# EAGLE board Servo_LED_X12 (EAGLE 9.5.2), part 1 of 3
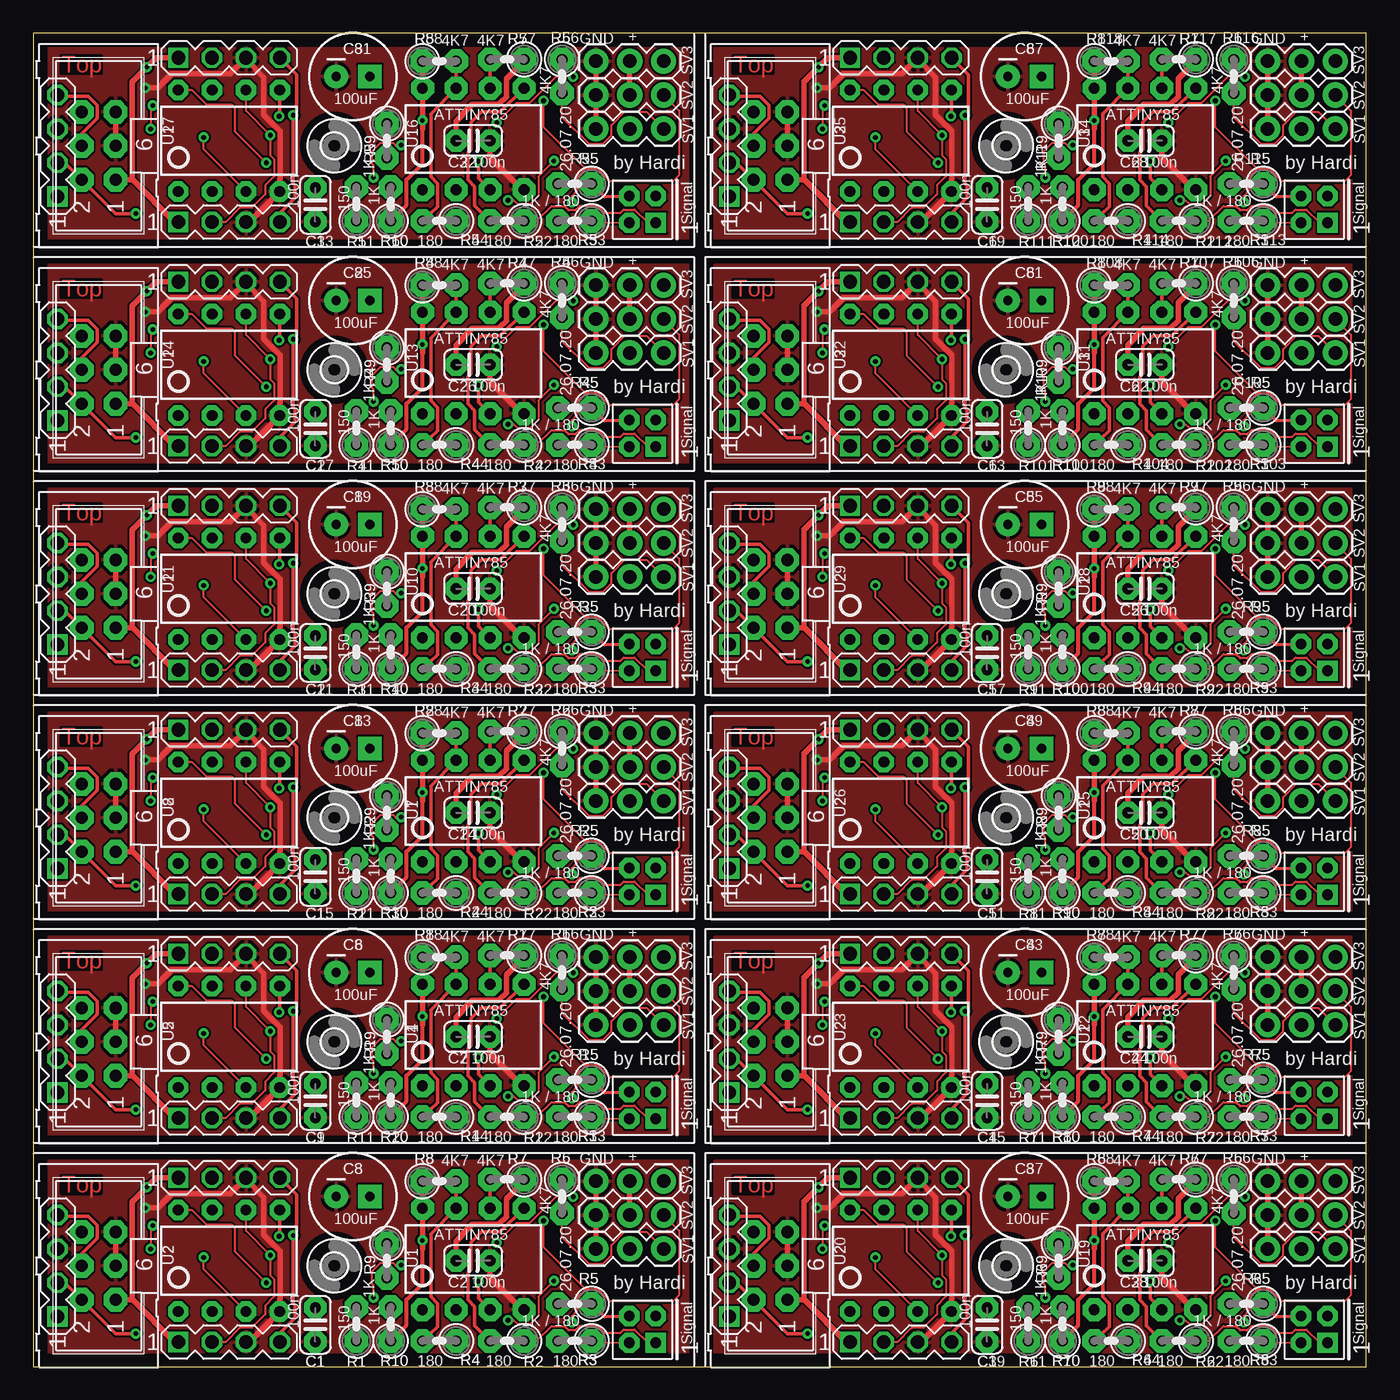
[diagram p0: board, top side]
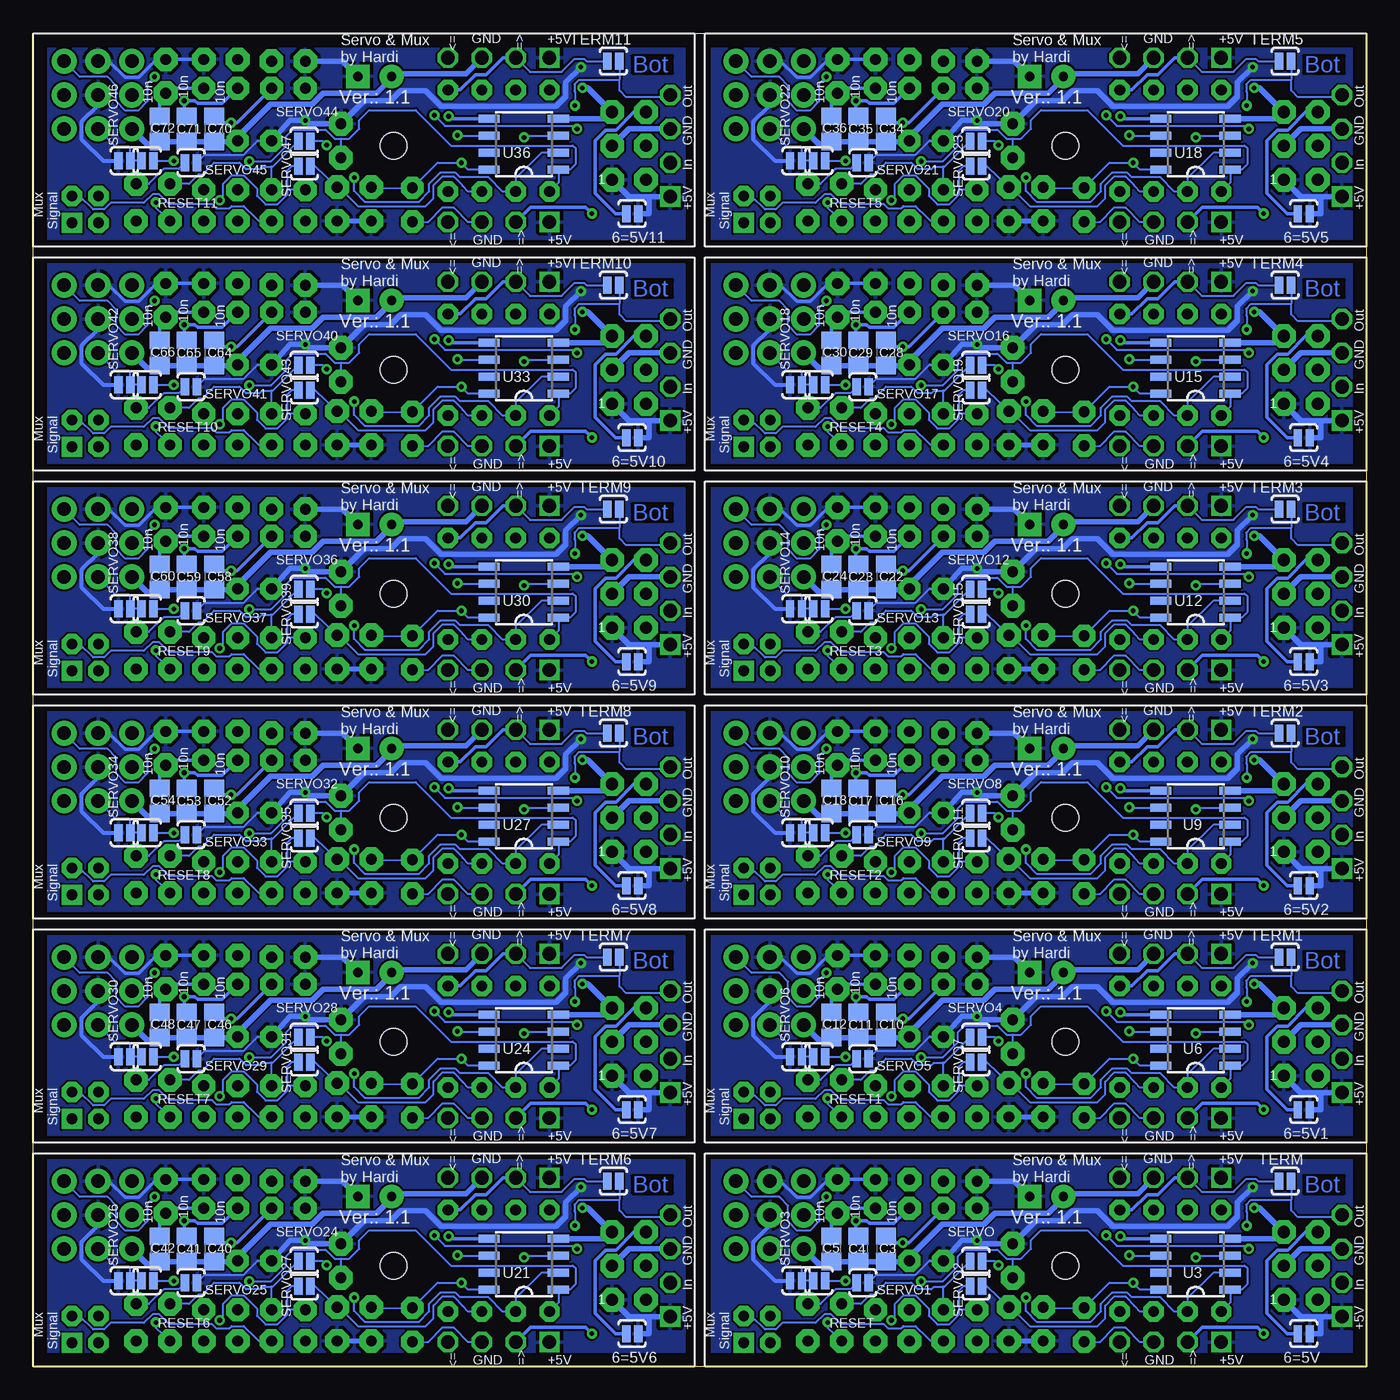
[diagram p1: board, bottom side, seen from below]

Size 100 x 99.99 mm. Coordinates in mm from the lower left corner, seen from the top.
Outline: 0,0 98.95,0
Outline: 0,15.99 0,0
Outline: 0,32.79 0,16.8
Outline: 0,49.59 0,33.6
Outline: 0,66.39 0,50.4
Outline: 0,83.19 0,67.2
Outline: 98.95,99.99 0,99.99 0,0
Outline: 50.4,0 98.95,0
Outline: 98.95,0 100,0
Outline: 100,0 100,15.99
Outline: 100,16.8 100,32.79
Outline: 100,33.6 100,49.59
Outline: 100,50.4 100,66.39
Outline: 100,67.2 100,83.19
Outline: 100,0 100,99.99 98.95,99.99
Outline: 98.95,99.99 50.4,99.99
Copper layers (1*16): Top 0.035mm / dielectric 1.5mm / Bottom 0.035mm
Design rules "default": minimum track width 6mil, minimum drill 0.35mm, track to track 6mil, track to pad 6mil, pad to pad 6mil, via to via 6mil, smd to smd 6mil, copper to edge 40mil, drill to drill 6mil, minimum pad ring 10mil, minimum via ring 8mil, stop-mask expansion 4mil, vias tented up to drill 0mil, thermal gap 10mil

## Footprints (pad centres in the part's own frame; a part is rotated, then mirrored left to right if it is on the bottom)
SJ_2S-NO = smd 0.635 x 1.27: 1 -0.45,0; 2 0.45,0
C025-024X044 = drill 0.813 pad 1.676 octagon: 1 -1.27,0; 2 1.27,0
C0805 = smd 1.3 x 1.5: 1 -0.95,0; 2 0.95,0
SPARKFUN-CAPACITORS_CPOL-RADIAL-100UF-25V = drill 0.7 pad 1.778 square: 1 1.27,0 | drill 0.7 pad 1.778: 2 -1.27,0
2,0 = hole 2: 0,0
1X03 = drill 1.016 pad 1.88: 1 0,0; 2 2.54,0; 3 5.08,0
ML6 = drill 0.914 pad 1.778 octagon: 1 -2.54,-1.27; 2 -2.54,1.27; 3 0,-1.27; 4 0,1.27; 5 2.54,-1.27; 6 2.54,1.27
RCL_0207/2V = drill 0.813 pad 1.778 octagon: 1 -1.27,0; 2 1.27,0
MUX-SIGNAL = drill 0.8 pad 1.524 square: 1 -1,-1 | drill 0.8 pad 1.524 octagon: 2 -1,1; 3 1,-1; 4 1,1
MA04-1 = drill 1.016 pad 1.524 square: 1 -3.81,0 | drill 1.016 pad 1.524 octagon: 2 -1.27,0; 3 1.27,0; 4 3.81,0
DIP08 = drill 0.813 pad 1.727 octagon: 1 -3.81,-3.81; 2 -1.27,-3.81; 3 1.27,-3.81; 4 3.81,-3.81; 5 3.81,3.81; 6 1.27,3.81; 7 -1.27,3.81; 8 -3.81,3.81
S3PO_MODUL_WS2811_SOUND_MP3-TF-16P_WS2811_AND_ATTINY_WS2811_DIP08 = drill 0.813 pad 1.524 octagon: 1 -3.81,-3.81; 2 -1.27,-3.81; 3 1.27,-3.81; 4 3.81,-3.81; 5 3.81,3.81; 6 1.27,3.81; 7 -1.27,3.81; 8 -3.81,3.81
SOP8 = smd 0.6 x 1.6: 1 -1.905,-2.6; 2 -0.635,-2.6; 3 0.635,-2.6; 4 1.905,-2.6; 5 1.905,2.6; 6 0.635,2.6; 7 -0.635,2.6; 8 -1.905,2.6

## Placement (x,y rotation side)
6=5V  SOLDERJUMPERNO  [SJ_2S-NO]  4.68,2.47 0 bottom
6=5V1  SOLDERJUMPERNO  [SJ_2S-NO]  4.68,19.28 0 bottom
6=5V2  SOLDERJUMPERNO  [SJ_2S-NO]  4.68,36.08 0 bottom
6=5V3  SOLDERJUMPERNO  [SJ_2S-NO]  4.68,52.88 0 bottom
6=5V4  SOLDERJUMPERNO  [SJ_2S-NO]  4.68,69.68 0 bottom
6=5V5  SOLDERJUMPERNO  [SJ_2S-NO]  4.68,86.48 0 bottom
6=5V6  SOLDERJUMPERNO  [SJ_2S-NO]  55.08,2.47 0 bottom
6=5V7  SOLDERJUMPERNO  [SJ_2S-NO]  55.08,19.28 0 bottom
6=5V8  SOLDERJUMPERNO  [SJ_2S-NO]  55.08,36.08 0 bottom
6=5V9  SOLDERJUMPERNO  [SJ_2S-NO]  55.08,52.88 0 bottom
6=5V10  SOLDERJUMPERNO  [SJ_2S-NO]  55.08,69.68 0 bottom
6=5V11  SOLDERJUMPERNO  [SJ_2S-NO]  55.08,86.48 0 bottom
C1  100n  [C025-024X044]  21.16,3.14 270 top
C2  100n  [C025-024X044]  33,7.94 0 top
C3  10n  [C0805]  36.05,8.82 270 bottom
C4  10n  [C0805]  38.08,8.82 270 bottom
C5  10n  [C0805]  40.11,8.82 270 bottom
C6  100uF  [SPARKFUN-CAPACITORS_CPOL-RADIAL-100UF-25V]  23.98,29.56 0 top
C7  100n  [C025-024X044]  33,24.74 0 top
C8  100uF  [SPARKFUN-CAPACITORS_CPOL-RADIAL-100UF-25V]  23.98,12.76 0 top
C9  100n  [C025-024X044]  21.16,19.94 270 top
C10  10n  [C0805]  36.05,25.63 270 bottom
C11  10n  [C0805]  38.08,25.63 270 bottom
C12  10n  [C0805]  40.11,25.63 270 bottom
C13  100uF  [SPARKFUN-CAPACITORS_CPOL-RADIAL-100UF-25V]  23.98,46.36 0 top
C14  100n  [C025-024X044]  33,41.54 0 top
C15  100n  [C025-024X044]  21.16,36.74 270 top
C16  10n  [C0805]  36.05,42.43 270 bottom
C17  10n  [C0805]  38.08,42.43 270 bottom
C18  10n  [C0805]  40.11,42.43 270 bottom
C19  100uF  [SPARKFUN-CAPACITORS_CPOL-RADIAL-100UF-25V]  23.98,63.16 0 top
C20  100n  [C025-024X044]  33,58.34 0 top
C21  100n  [C025-024X044]  21.16,53.54 270 top
C22  10n  [C0805]  36.05,59.23 270 bottom
C23  10n  [C0805]  38.08,59.23 270 bottom
C24  10n  [C0805]  40.11,59.23 270 bottom
C25  100uF  [SPARKFUN-CAPACITORS_CPOL-RADIAL-100UF-25V]  23.98,79.96 0 top
C26  100n  [C025-024X044]  33,75.14 0 top
C27  100n  [C025-024X044]  21.16,70.34 270 top
C28  10n  [C0805]  36.05,76.03 270 bottom
C29  10n  [C0805]  38.08,76.03 270 bottom
C30  10n  [C0805]  40.11,76.03 270 bottom
C31  100uF  [SPARKFUN-CAPACITORS_CPOL-RADIAL-100UF-25V]  23.98,96.76 0 top
C32  100n  [C025-024X044]  33,91.94 0 top
C33  100n  [C025-024X044]  21.16,87.14 270 top
C34  10n  [C0805]  36.05,92.83 270 bottom
C35  10n  [C0805]  38.08,92.83 270 bottom
C36  10n  [C0805]  40.11,92.83 270 bottom
C37  100uF  [SPARKFUN-CAPACITORS_CPOL-RADIAL-100UF-25V]  74.38,12.76 0 top
C38  100n  [C025-024X044]  83.4,7.94 0 top
C39  100n  [C025-024X044]  71.56,3.14 270 top
C40  10n  [C0805]  86.45,8.82 270 bottom
C41  10n  [C0805]  88.48,8.82 270 bottom
C42  10n  [C0805]  90.51,8.82 270 bottom
C43  100uF  [SPARKFUN-CAPACITORS_CPOL-RADIAL-100UF-25V]  74.38,29.56 0 top
C44  100n  [C025-024X044]  83.4,24.74 0 top
C45  100n  [C025-024X044]  71.56,19.94 270 top
C46  10n  [C0805]  86.45,25.63 270 bottom
C47  10n  [C0805]  88.48,25.63 270 bottom
C48  10n  [C0805]  90.51,25.63 270 bottom
C49  100uF  [SPARKFUN-CAPACITORS_CPOL-RADIAL-100UF-25V]  74.38,46.36 0 top
C50  100n  [C025-024X044]  83.4,41.54 0 top
C51  100n  [C025-024X044]  71.56,36.74 270 top
C52  10n  [C0805]  86.45,42.43 270 bottom
C53  10n  [C0805]  88.48,42.43 270 bottom
C54  10n  [C0805]  90.51,42.43 270 bottom
C55  100uF  [SPARKFUN-CAPACITORS_CPOL-RADIAL-100UF-25V]  74.38,63.16 0 top
C56  100n  [C025-024X044]  83.4,58.34 0 top
C57  100n  [C025-024X044]  71.56,53.54 270 top
C58  10n  [C0805]  86.45,59.23 270 bottom
C59  10n  [C0805]  88.48,59.23 270 bottom
C60  10n  [C0805]  90.51,59.23 270 bottom
C61  100uF  [SPARKFUN-CAPACITORS_CPOL-RADIAL-100UF-25V]  74.38,79.96 0 top
C62  100n  [C025-024X044]  83.4,75.14 0 top
C63  100n  [C025-024X044]  71.56,70.34 270 top
C64  10n  [C0805]  86.45,76.03 270 bottom
C65  10n  [C0805]  88.48,76.03 270 bottom
C66  10n  [C0805]  90.51,76.03 270 bottom
C67  100uF  [SPARKFUN-CAPACITORS_CPOL-RADIAL-100UF-25V]  74.38,96.76 0 top
C68  100n  [C025-024X044]  83.4,91.94 0 top
C69  100n  [C025-024X044]  71.56,87.14 270 top
C70  10n  [C0805]  86.45,92.83 270 bottom
C71  10n  [C0805]  88.48,92.83 270 bottom
C72  10n  [C0805]  90.51,92.83 270 bottom
H1  MOUNT-HOLE2.0  [2,0]  22.59,7.55 0 top
H2  MOUNT-HOLE2.0  [2,0]  22.59,24.36 0 top
H3  MOUNT-HOLE2.0  [2,0]  22.59,41.16 0 top
H4  MOUNT-HOLE2.0  [2,0]  22.59,57.96 0 top
H5  MOUNT-HOLE2.0  [2,0]  22.59,74.76 0 top
H6  MOUNT-HOLE2.0  [2,0]  22.59,91.56 0 top
H7  MOUNT-HOLE2.0  [2,0]  72.99,7.55 0 top
H8  MOUNT-HOLE2.0  [2,0]  72.99,24.36 0 top
H9  MOUNT-HOLE2.0  [2,0]  72.99,41.16 0 top
H10  MOUNT-HOLE2.0  [2,0]  72.99,57.96 0 top
H11  MOUNT-HOLE2.0  [2,0]  72.99,74.76 0 top
H12  MOUNT-HOLE2.0  [2,0]  72.99,91.56 0 top
J1  SV1  [1X03]  47.29,8.82 180 top
J2  SV2  [1X03]  47.29,11.36 180 top
J3  SV3  [1X03]  47.29,13.9 180 top
J4  SV1  [1X03]  47.29,25.63 180 top
J5  SV2  [1X03]  47.29,28.17 180 top
J6  SV3  [1X03]  47.29,30.71 180 top
J7  SV1  [1X03]  47.29,42.43 180 top
J8  SV2  [1X03]  47.29,44.97 180 top
J9  SV3  [1X03]  47.29,47.51 180 top
J10  SV1  [1X03]  47.29,59.23 180 top
J11  SV2  [1X03]  47.29,61.77 180 top
J12  SV3  [1X03]  47.29,64.31 180 top
J13  SV1  [1X03]  47.29,76.03 180 top
J14  SV2  [1X03]  47.29,78.57 180 top
J15  SV3  [1X03]  47.29,81.11 180 top
J16  SV1  [1X03]  47.29,92.83 180 top
J17  SV2  [1X03]  47.29,95.37 180 top
J18  SV3  [1X03]  47.29,97.91 180 top
J19  SV1  [1X03]  97.69,8.82 180 top
J20  SV2  [1X03]  97.69,11.36 180 top
J21  SV3  [1X03]  97.69,13.9 180 top
J22  SV1  [1X03]  97.69,25.63 180 top
J23  SV2  [1X03]  97.69,28.17 180 top
J24  SV3  [1X03]  97.69,30.71 180 top
J25  SV1  [1X03]  97.69,42.43 180 top
J26  SV2  [1X03]  97.69,44.97 180 top
J27  SV3  [1X03]  97.69,47.51 180 top
J28  SV1  [1X03]  97.69,59.23 180 top
J29  SV2  [1X03]  97.69,61.77 180 top
J30  SV3  [1X03]  97.69,64.31 180 top
J31  SV1  [1X03]  97.69,76.03 180 top
J32  SV2  [1X03]  97.69,78.57 180 top
J33  SV3  [1X03]  97.69,81.11 180 top
J34  SV1  [1X03]  97.69,92.83 180 top
J35  SV2  [1X03]  97.69,95.37 180 top
J36  SV3  [1X03]  97.69,97.91 180 top
O1  [ML6]  4.9,7.55 90 top
O2  [ML6]  4.9,24.36 90 top
O3  [ML6]  4.9,41.16 90 top
O4  [ML6]  4.9,57.96 90 top
O5  [ML6]  4.9,74.76 90 top
O6  [ML6]  4.9,91.56 90 top
O7  [ML6]  55.3,7.55 90 top
O8  [ML6]  55.3,24.36 90 top
O9  [ML6]  55.3,41.16 90 top
O10  [ML6]  55.3,57.96 90 top
O11  [ML6]  55.3,74.76 90 top
O12  [ML6]  55.3,91.56 90 top
R1  150  [RCL_0207/2V]  24.24,3.19 90 top
R2  180  [RCL_0207/2V]  35.54,1.92 180 top
R3  180  [RCL_0207/2V]  40.62,1.92 180 top
R4  180  [RCL_0207/2V]  30.46,1.92 180 top
R5  1K / 180  [RCL_0207/2V]  40.62,4.7 180 top
R6  4K7  [RCL_0207/2V]  39.67,12.76 270 top
R7  4K7  [RCL_0207/2V]  35.54,14.03 180 top
R8  4K7  [RCL_0207/2V]  30.46,13.9 0 top
R9  1K  [RCL_0207/2V]  26.52,7.94 270 top
R10  1K  [RCL_0207/2V]  26.81,3.19 90 top
R11  150  [RCL_0207/2V]  24.24,19.99 90 top
R12  180  [RCL_0207/2V]  35.54,18.72 180 top
R13  180  [RCL_0207/2V]  40.62,18.72 180 top
R14  180  [RCL_0207/2V]  30.46,18.72 180 top
R15  1K / 180  [RCL_0207/2V]  40.62,21.5 180 top
R16  4K7  [RCL_0207/2V]  39.67,29.56 270 top
R17  4K7  [RCL_0207/2V]  35.54,30.83 180 top
R18  4K7  [RCL_0207/2V]  30.46,30.71 0 top
R19  1K  [RCL_0207/2V]  26.52,24.74 270 top
R20  1K  [RCL_0207/2V]  26.81,19.99 90 top
R21  150  [RCL_0207/2V]  24.24,36.79 90 top
R22  180  [RCL_0207/2V]  35.54,35.52 180 top
R23  180  [RCL_0207/2V]  40.62,35.52 180 top
R24  180  [RCL_0207/2V]  30.46,35.52 180 top
R25  1K / 180  [RCL_0207/2V]  40.62,38.3 180 top
R26  4K7  [RCL_0207/2V]  39.67,46.36 270 top
R27  4K7  [RCL_0207/2V]  35.54,47.63 180 top
R28  4K7  [RCL_0207/2V]  30.46,47.51 0 top
R29  1K  [RCL_0207/2V]  26.52,41.54 270 top
R30  1K  [RCL_0207/2V]  26.81,36.79 90 top
R31  150  [RCL_0207/2V]  24.24,53.59 90 top
R32  180  [RCL_0207/2V]  35.54,52.32 180 top
R33  180  [RCL_0207/2V]  40.62,52.32 180 top
R34  180  [RCL_0207/2V]  30.46,52.32 180 top
R35  1K / 180  [RCL_0207/2V]  40.62,55.1 180 top
R36  4K7  [RCL_0207/2V]  39.67,63.16 270 top
R37  4K7  [RCL_0207/2V]  35.54,64.43 180 top
R38  4K7  [RCL_0207/2V]  30.46,64.31 0 top
R39  1K  [RCL_0207/2V]  26.52,58.34 270 top
R40  1K  [RCL_0207/2V]  26.81,53.59 90 top
R41  150  [RCL_0207/2V]  24.24,70.39 90 top
R42  180  [RCL_0207/2V]  35.54,69.12 180 top
R43  180  [RCL_0207/2V]  40.62,69.12 180 top
R44  180  [RCL_0207/2V]  30.46,69.12 180 top
R45  1K / 180  [RCL_0207/2V]  40.62,71.9 180 top
R46  4K7  [RCL_0207/2V]  39.67,79.96 270 top
R47  4K7  [RCL_0207/2V]  35.54,81.23 180 top
R48  4K7  [RCL_0207/2V]  30.46,81.11 0 top
R49  1K  [RCL_0207/2V]  26.52,75.14 270 top
R50  1K  [RCL_0207/2V]  26.81,70.39 90 top
R51  150  [RCL_0207/2V]  24.24,87.19 90 top
R52  180  [RCL_0207/2V]  35.54,85.92 180 top
R53  180  [RCL_0207/2V]  40.62,85.92 180 top
R54  180  [RCL_0207/2V]  30.46,85.92 180 top
R55  1K / 180  [RCL_0207/2V]  40.62,88.7 180 top
R56  4K7  [RCL_0207/2V]  39.67,96.76 270 top
R57  4K7  [RCL_0207/2V]  35.54,98.03 180 top
R58  4K7  [RCL_0207/2V]  30.46,97.91 0 top
R59  1K  [RCL_0207/2V]  26.52,91.94 270 top
R60  1K  [RCL_0207/2V]  26.81,87.19 90 top
R61  150  [RCL_0207/2V]  74.64,3.19 90 top
R62  180  [RCL_0207/2V]  85.94,1.92 180 top
R63  180  [RCL_0207/2V]  91.02,1.92 180 top
R64  180  [RCL_0207/2V]  80.86,1.92 180 top
R65  1K / 180  [RCL_0207/2V]  91.02,4.7 180 top
R66  4K7  [RCL_0207/2V]  90.07,12.76 270 top
R67  4K7  [RCL_0207/2V]  85.94,14.03 180 top
R68  4K7  [RCL_0207/2V]  80.86,13.9 0 top
R69  1K  [RCL_0207/2V]  76.92,7.94 270 top
R70  1K  [RCL_0207/2V]  77.21,3.19 90 top
R71  150  [RCL_0207/2V]  74.64,19.99 90 top
R72  180  [RCL_0207/2V]  85.94,18.72 180 top
R73  180  [RCL_0207/2V]  91.02,18.72 180 top
R74  180  [RCL_0207/2V]  80.86,18.72 180 top
R75  1K / 180  [RCL_0207/2V]  91.02,21.5 180 top
R76  4K7  [RCL_0207/2V]  90.07,29.56 270 top
R77  4K7  [RCL_0207/2V]  85.94,30.83 180 top
R78  4K7  [RCL_0207/2V]  80.86,30.71 0 top
R79  1K  [RCL_0207/2V]  76.92,24.74 270 top
R80  1K  [RCL_0207/2V]  77.21,19.99 90 top
R81  150  [RCL_0207/2V]  74.64,36.79 90 top
R82  180  [RCL_0207/2V]  85.94,35.52 180 top
R83  180  [RCL_0207/2V]  91.02,35.52 180 top
R84  180  [RCL_0207/2V]  80.86,35.52 180 top
R85  1K / 180  [RCL_0207/2V]  91.02,38.3 180 top
R86  4K7  [RCL_0207/2V]  90.07,46.36 270 top
R87  4K7  [RCL_0207/2V]  85.94,47.63 180 top
R88  4K7  [RCL_0207/2V]  80.86,47.51 0 top
R89  1K  [RCL_0207/2V]  76.92,41.54 270 top
R90  1K  [RCL_0207/2V]  77.21,36.79 90 top
R91  150  [RCL_0207/2V]  74.64,53.59 90 top
R92  180  [RCL_0207/2V]  85.94,52.32 180 top
R93  180  [RCL_0207/2V]  91.02,52.32 180 top
R94  180  [RCL_0207/2V]  80.86,52.32 180 top
R95  1K / 180  [RCL_0207/2V]  91.02,55.1 180 top
R96  4K7  [RCL_0207/2V]  90.07,63.16 270 top
R97  4K7  [RCL_0207/2V]  85.94,64.43 180 top
R98  4K7  [RCL_0207/2V]  80.86,64.31 0 top
R99  1K  [RCL_0207/2V]  76.92,58.34 270 top
R100  1K  [RCL_0207/2V]  77.21,53.59 90 top
R101  150  [RCL_0207/2V]  74.64,70.39 90 top
R102  180  [RCL_0207/2V]  85.94,69.12 180 top
R103  180  [RCL_0207/2V]  91.02,69.12 180 top
R104  180  [RCL_0207/2V]  80.86,69.12 180 top
R105  1K / 180  [RCL_0207/2V]  91.02,71.9 180 top
R106  4K7  [RCL_0207/2V]  90.07,79.96 270 top
R107  4K7  [RCL_0207/2V]  85.94,81.23 180 top
R108  4K7  [RCL_0207/2V]  80.86,81.11 0 top
R109  1K  [RCL_0207/2V]  76.92,75.14 270 top
R110  1K  [RCL_0207/2V]  77.21,70.39 90 top
R111  150  [RCL_0207/2V]  74.64,87.19 90 top
R112  180  [RCL_0207/2V]  85.94,85.92 180 top
R113  180  [RCL_0207/2V]  91.02,85.92 180 top
R114  180  [RCL_0207/2V]  80.86,85.92 180 top
R115  1K / 180  [RCL_0207/2V]  91.02,88.7 180 top
R116  4K7  [RCL_0207/2V]  90.07,96.76 270 top
R117  4K7  [RCL_0207/2V]  85.94,98.03 180 top
R118  4K7  [RCL_0207/2V]  80.86,97.91 0 top
R119  1K  [RCL_0207/2V]  76.92,91.94 270 top
R120  1K  [RCL_0207/2V]  77.21,87.19 90 top
RESET  SOLDERJUMPERNO  [SJ_2S-NO]  41.05,6.44 180 bottom
RESET1  SOLDERJUMPERNO  [SJ_2S-NO]  41.05,23.24 180 bottom
RESET2  SOLDERJUMPERNO  [SJ_2S-NO]  41.05,40.04 180 bottom
RESET3  SOLDERJUMPERNO  [SJ_2S-NO]  41.05,56.84 180 bottom
RESET4  SOLDERJUMPERNO  [SJ_2S-NO]  41.05,73.64 180 bottom
RESET5  SOLDERJUMPERNO  [SJ_2S-NO]  41.05,90.44 180 bottom
RESET6  SOLDERJUMPERNO  [SJ_2S-NO]  91.45,6.44 180 bottom
RESET7  SOLDERJUMPERNO  [SJ_2S-NO]  91.45,23.24 180 bottom
RESET8  SOLDERJUMPERNO  [SJ_2S-NO]  91.45,40.04 180 bottom
RESET9  SOLDERJUMPERNO  [SJ_2S-NO]  91.45,56.84 180 bottom
RESET10  SOLDERJUMPERNO  [SJ_2S-NO]  91.45,73.64 180 bottom
RESET11  SOLDERJUMPERNO  [SJ_2S-NO]  91.45,90.44 180 bottom
SERVO  SOLDERJUMPERNO  [SJ_2S-NO]  29.28,7.9 180 bottom
SERVO1  SOLDERJUMPERNO  [SJ_2S-NO]  37.76,6.29 0 bottom
SERVO2  SOLDERJUMPERNO  [SJ_2S-NO]  29.27,6.03 180 bottom
SERVO3  SOLDERJUMPERNO  [SJ_2S-NO]  42.78,6.44 180 bottom
SERVO4  SOLDERJUMPERNO  [SJ_2S-NO]  29.28,24.7 180 bottom
SERVO5  SOLDERJUMPERNO  [SJ_2S-NO]  37.76,23.09 0 bottom
SERVO6  SOLDERJUMPERNO  [SJ_2S-NO]  42.78,23.24 180 bottom
SERVO7  SOLDERJUMPERNO  [SJ_2S-NO]  29.27,22.83 180 bottom
SERVO8  SOLDERJUMPERNO  [SJ_2S-NO]  29.28,41.5 180 bottom
SERVO9  SOLDERJUMPERNO  [SJ_2S-NO]  37.76,39.89 0 bottom
SERVO10  SOLDERJUMPERNO  [SJ_2S-NO]  42.78,40.04 180 bottom
SERVO11  SOLDERJUMPERNO  [SJ_2S-NO]  29.27,39.63 180 bottom
SERVO12  SOLDERJUMPERNO  [SJ_2S-NO]  29.28,58.3 180 bottom
SERVO13  SOLDERJUMPERNO  [SJ_2S-NO]  37.76,56.69 0 bottom
SERVO14  SOLDERJUMPERNO  [SJ_2S-NO]  42.78,56.84 180 bottom
SERVO15  SOLDERJUMPERNO  [SJ_2S-NO]  29.27,56.43 180 bottom
SERVO16  SOLDERJUMPERNO  [SJ_2S-NO]  29.28,75.1 180 bottom
SERVO17  SOLDERJUMPERNO  [SJ_2S-NO]  37.76,73.49 0 bottom
SERVO18  SOLDERJUMPERNO  [SJ_2S-NO]  42.78,73.64 180 bottom
SERVO19  SOLDERJUMPERNO  [SJ_2S-NO]  29.27,73.23 180 bottom
SERVO20  SOLDERJUMPERNO  [SJ_2S-NO]  29.28,91.9 180 bottom
SERVO21  SOLDERJUMPERNO  [SJ_2S-NO]  37.76,90.29 0 bottom
SERVO22  SOLDERJUMPERNO  [SJ_2S-NO]  42.78,90.44 180 bottom
SERVO23  SOLDERJUMPERNO  [SJ_2S-NO]  29.27,90.03 180 bottom
SERVO24  SOLDERJUMPERNO  [SJ_2S-NO]  79.68,7.9 180 bottom
SERVO25  SOLDERJUMPERNO  [SJ_2S-NO]  88.16,6.29 0 bottom
SERVO26  SOLDERJUMPERNO  [SJ_2S-NO]  93.18,6.44 180 bottom
SERVO27  SOLDERJUMPERNO  [SJ_2S-NO]  79.67,6.03 180 bottom
SERVO28  SOLDERJUMPERNO  [SJ_2S-NO]  79.68,24.7 180 bottom
SERVO29  SOLDERJUMPERNO  [SJ_2S-NO]  88.16,23.09 0 bottom
SERVO30  SOLDERJUMPERNO  [SJ_2S-NO]  93.18,23.24 180 bottom
SERVO31  SOLDERJUMPERNO  [SJ_2S-NO]  79.67,22.83 180 bottom
SERVO32  SOLDERJUMPERNO  [SJ_2S-NO]  79.68,41.5 180 bottom
SERVO33  SOLDERJUMPERNO  [SJ_2S-NO]  88.16,39.89 0 bottom
SERVO34  SOLDERJUMPERNO  [SJ_2S-NO]  93.18,40.04 180 bottom
SERVO35  SOLDERJUMPERNO  [SJ_2S-NO]  79.67,39.63 180 bottom
SERVO36  SOLDERJUMPERNO  [SJ_2S-NO]  79.68,58.3 180 bottom
SERVO37  SOLDERJUMPERNO  [SJ_2S-NO]  88.16,56.69 0 bottom
SERVO38  SOLDERJUMPERNO  [SJ_2S-NO]  93.18,56.84 180 bottom
SERVO39  SOLDERJUMPERNO  [SJ_2S-NO]  79.67,56.43 180 bottom
SERVO40  SOLDERJUMPERNO  [SJ_2S-NO]  79.68,75.1 180 bottom
SERVO41  SOLDERJUMPERNO  [SJ_2S-NO]  88.16,73.49 0 bottom
SERVO42  SOLDERJUMPERNO  [SJ_2S-NO]  93.18,73.64 180 bottom
SERVO43  SOLDERJUMPERNO  [SJ_2S-NO]  79.67,73.23 180 bottom
SERVO44  SOLDERJUMPERNO  [SJ_2S-NO]  79.68,91.9 180 bottom
SERVO45  SOLDERJUMPERNO  [SJ_2S-NO]  88.16,90.29 0 bottom
SERVO46  SOLDERJUMPERNO  [SJ_2S-NO]  93.18,90.44 180 bottom
SERVO47  SOLDERJUMPERNO  [SJ_2S-NO]  79.67,90.03 180 bottom
SV1  [MUX-SIGNAL]  45.71,2.78 90 top
SV2  [MA04-1]  14.68,30.96 0 top
SV3  [MA04-1]  14.68,14.16 0 top
SV4  [MA04-1]  14.68,1.84 0 top
SV5  [MA04-1]  1.82,7.55 90 top
SV6  [MA04-1]  14.68,18.64 0 top
SV7  [MA04-1]  1.82,24.36 90 top
SV8  [MUX-SIGNAL]  45.71,19.58 90 top
SV9  [MA04-1]  14.68,47.76 0 top
SV10  [MA04-1]  14.68,35.44 0 top
SV11  [MA04-1]  1.82,41.16 90 top
SV12  [MUX-SIGNAL]  45.71,36.38 90 top
SV13  [MA04-1]  14.68,64.56 0 top
SV14  [MA04-1]  14.68,52.24 0 top
SV15  [MA04-1]  1.82,57.96 90 top
SV16  [MUX-SIGNAL]  45.71,53.18 90 top
SV17  [MA04-1]  14.68,81.36 0 top
SV18  [MA04-1]  14.68,69.04 0 top
SV19  [MA04-1]  1.82,74.76 90 top
SV20  [MUX-SIGNAL]  45.71,69.98 90 top
SV21  [MA04-1]  14.68,98.16 0 top
SV22  [MA04-1]  14.68,85.84 0 top
SV23  [MA04-1]  1.82,91.56 90 top
SV24  [MUX-SIGNAL]  45.71,86.78 90 top
SV25  [MA04-1]  65.08,14.16 0 top
SV26  [MA04-1]  65.08,1.84 0 top
SV27  [MA04-1]  52.22,7.55 90 top
SV28  [MUX-SIGNAL]  96.11,2.78 90 top
SV29  [MA04-1]  65.08,30.96 0 top
SV30  [MA04-1]  65.08,18.64 0 top
SV31  [MA04-1]  52.22,24.36 90 top
SV32  [MUX-SIGNAL]  96.11,19.58 90 top
SV33  [MA04-1]  65.08,47.76 0 top
SV34  [MA04-1]  65.08,35.44 0 top
SV35  [MA04-1]  52.22,41.16 90 top
SV36  [MUX-SIGNAL]  96.11,36.38 90 top
SV37  [MA04-1]  65.08,64.56 0 top
SV38  [MA04-1]  65.08,52.24 0 top
SV39  [MA04-1]  52.22,57.96 90 top
SV40  [MUX-SIGNAL]  96.11,53.18 90 top
SV41  [MA04-1]  65.08,81.36 0 top
SV42  [MA04-1]  65.08,69.04 0 top
SV43  [MA04-1]  52.22,74.76 90 top
SV44  [MUX-SIGNAL]  96.11,69.98 90 top
SV45  [MA04-1]  65.08,98.16 0 top
SV46  [MA04-1]  65.08,85.84 0 top
SV47  [MA04-1]  52.22,91.56 90 top
SV48  [MUX-SIGNAL]  96.11,86.78 90 top
TERM  SOLDERJUMPERNO  [SJ_2S-NO]  6.08,13.9 180 bottom
TERM1  SOLDERJUMPERNO  [SJ_2S-NO]  6.08,30.71 180 bottom
TERM2  SOLDERJUMPERNO  [SJ_2S-NO]  6.08,47.51 180 bottom
TERM3  SOLDERJUMPERNO  [SJ_2S-NO]  6.08,64.31 180 bottom
TERM4  SOLDERJUMPERNO  [SJ_2S-NO]  6.08,81.11 180 bottom
TERM5  SOLDERJUMPERNO  [SJ_2S-NO]  6.08,97.91 180 bottom
TERM6  SOLDERJUMPERNO  [SJ_2S-NO]  56.48,13.9 180 bottom
TERM7  SOLDERJUMPERNO  [SJ_2S-NO]  56.48,30.71 180 bottom
TERM8  SOLDERJUMPERNO  [SJ_2S-NO]  56.48,47.51 180 bottom
TERM9  SOLDERJUMPERNO  [SJ_2S-NO]  56.48,64.31 180 bottom
TERM10  SOLDERJUMPERNO  [SJ_2S-NO]  56.48,81.11 180 bottom
TERM11  SOLDERJUMPERNO  [SJ_2S-NO]  56.48,97.91 180 bottom
U1  ATTINY85  [DIP08]  33,8.06 0 top
U2  TINY45-20-DIP  [S3PO_MODUL_WS2811_SOUND_MP3-TF-16P_WS2811_AND_ATTINY_WS2811_DIP08]  14.68,7.94 0 top
U3  WS2811 SOT-8  [SOP8]  12.8,7.68 90 bottom
U4  ATTINY85  [DIP08]  33,24.86 0 top
U5  TINY45-20-DIP  [S3PO_MODUL_WS2811_SOUND_MP3-TF-16P_WS2811_AND_ATTINY_WS2811_DIP08]  14.68,24.74 0 top
U6  WS2811 SOT-8  [SOP8]  12.8,24.48 90 bottom
U7  ATTINY85  [DIP08]  33,41.66 0 top
U8  TINY45-20-DIP  [S3PO_MODUL_WS2811_SOUND_MP3-TF-16P_WS2811_AND_ATTINY_WS2811_DIP08]  14.68,41.54 0 top
U9  WS2811 SOT-8  [SOP8]  12.8,41.28 90 bottom
U10  ATTINY85  [DIP08]  33,58.46 0 top
U11  TINY45-20-DIP  [S3PO_MODUL_WS2811_SOUND_MP3-TF-16P_WS2811_AND_ATTINY_WS2811_DIP08]  14.68,58.34 0 top
U12  WS2811 SOT-8  [SOP8]  12.8,58.08 90 bottom
U13  ATTINY85  [DIP08]  33,75.26 0 top
U14  TINY45-20-DIP  [S3PO_MODUL_WS2811_SOUND_MP3-TF-16P_WS2811_AND_ATTINY_WS2811_DIP08]  14.68,75.14 0 top
U15  WS2811 SOT-8  [SOP8]  12.8,74.88 90 bottom
U16  ATTINY85  [DIP08]  33,92.06 0 top
U17  TINY45-20-DIP  [S3PO_MODUL_WS2811_SOUND_MP3-TF-16P_WS2811_AND_ATTINY_WS2811_DIP08]  14.68,91.94 0 top
U18  WS2811 SOT-8  [SOP8]  12.8,91.68 90 bottom
U19  ATTINY85  [DIP08]  83.4,8.06 0 top
U20  TINY45-20-DIP  [S3PO_MODUL_WS2811_SOUND_MP3-TF-16P_WS2811_AND_ATTINY_WS2811_DIP08]  65.08,7.94 0 top
U21  WS2811 SOT-8  [SOP8]  63.2,7.68 90 bottom
U22  ATTINY85  [DIP08]  83.4,24.86 0 top
U23  TINY45-20-DIP  [S3PO_MODUL_WS2811_SOUND_MP3-TF-16P_WS2811_AND_ATTINY_WS2811_DIP08]  65.08,24.74 0 top
U24  WS2811 SOT-8  [SOP8]  63.2,24.48 90 bottom
U25  ATTINY85  [DIP08]  83.4,41.66 0 top
U26  TINY45-20-DIP  [S3PO_MODUL_WS2811_SOUND_MP3-TF-16P_WS2811_AND_ATTINY_WS2811_DIP08]  65.08,41.54 0 top
U27  WS2811 SOT-8  [SOP8]  63.2,41.28 90 bottom
U28  ATTINY85  [DIP08]  83.4,58.46 0 top
U29  TINY45-20-DIP  [S3PO_MODUL_WS2811_SOUND_MP3-TF-16P_WS2811_AND_ATTINY_WS2811_DIP08]  65.08,58.34 0 top
U30  WS2811 SOT-8  [SOP8]  63.2,58.08 90 bottom
U31  ATTINY85  [DIP08]  83.4,75.26 0 top
U32  TINY45-20-DIP  [S3PO_MODUL_WS2811_SOUND_MP3-TF-16P_WS2811_AND_ATTINY_WS2811_DIP08]  65.08,75.14 0 top
U33  WS2811 SOT-8  [SOP8]  63.2,74.88 90 bottom
U34  ATTINY85  [DIP08]  83.4,92.06 0 top
U35  TINY45-20-DIP  [S3PO_MODUL_WS2811_SOUND_MP3-TF-16P_WS2811_AND_ATTINY_WS2811_DIP08]  65.08,91.94 0 top
U36  WS2811 SOT-8  [SOP8]  63.2,91.68 90 bottom

## Library data of the parts
6=5V 6=5V1-6=5V11 RESET RESET1-RESET11 SERVO SERVO1-SERVO47 TERM TERM1-TERM11 = SparkFun-Retired
C1-C5 C7 C9-C12 C14-C18 C20-C24 C26-C30 C32-C36 C38-C42 C44-C48 C50-C54 C56-C60 C62-C66 C68-C72 = rcl; SPICEPREFIX: C
C6 C8 C13 C19 C25 C31 C37 C43 C49 C55 C61 C67 = Sound_MP3-TF-16P_and_WS2811; PROD_ID: CAP-08439
H1-H12 = holes
J1-J36 = SparkFun-Connectors
O1-O12 = con-harting-ml; OC_FARNELL: unknown; OC_NEWARK: unknown
R1-R120 = Sound_MP3-TF-16P_and_WS2811; SPICEPREFIX: R
SV1-SV48 = con-lstb
U1 U4 U7 U10 U13 U16 U19 U22 U25 U28 U31 U34 = SparkFun-DigitalIC; PROD_ID: IC-09445
U2 U5 U8 U11 U14 U17 U20 U23 U26 U29 U32 U35 = S3PO_Modul_WS2811; PROD_ID: IC-09439
U3 U6 U9 U12 U15 U18 U21 U24 U27 U30 U33 U36 = S3PO_Modul_WS2811

## Nets
+5V: 6=5V.2 C2.1 C8.1 J2.2 J3.2 O1.1 R1.1 R6.1 R7.1 R8.1 R9.1 R10.1 SERVO1.2 SERVO3.2 SV3.1 SV4.1 SV5.1 U1.8
+5V1: 6=5V1.2 C6.1 C7.1 J5.2 J6.2 O2.1 R11.1 R16.1 R17.1 R18.1 R19.1 R20.1 SERVO5.2 SERVO6.2 SV2.1 SV6.1 SV7.1 U4.8
+5V2: 6=5V2.2 C13.1 C14.1 J8.2 J9.2 O3.1 R21.1 R26.1 R27.1 R28.1 R29.1 R30.1 SERVO9.2 SERVO10.2 SV9.1 SV10.1 SV11.1 U7.8
+5V3: 6=5V3.2 C19.1 C20.1 J11.2 J12.2 O4.1 R31.1 R36.1 R37.1 R38.1 R39.1 R40.1 SERVO13.2 SERVO14.2 SV13.1 SV14.1 SV15.1 U10.8
+5V4: 6=5V4.2 C25.1 C26.1 J14.2 J15.2 O5.1 R41.1 R46.1 R47.1 R48.1 R49.1 R50.1 SERVO17.2 SERVO18.2 SV17.1 SV18.1 SV19.1 U13.8
+5V5: 6=5V5.2 C31.1 C32.1 J17.2 J18.2 O6.1 R51.1 R56.1 R57.1 R58.1 R59.1 R60.1 SERVO21.2 SERVO22.2 SV21.1 SV22.1 SV23.1 U16.8
+5V6: 6=5V6.2 C37.1 C38.1 J20.2 J21.2 O7.1 R61.1 R66.1 R67.1 R68.1 R69.1 R70.1 SERVO25.2 SERVO26.2 SV25.1 SV26.1 SV27.1 U19.8
+5V7: 6=5V7.2 C43.1 C44.1 J23.2 J24.2 O8.1 R71.1 R76.1 R77.1 R78.1 R79.1 R80.1 SERVO29.2 SERVO30.2 SV29.1 SV30.1 SV31.1 U22.8
+5V8: 6=5V8.2 C49.1 C50.1 J26.2 J27.2 O9.1 R81.1 R86.1 R87.1 R88.1 R89.1 R90.1 SERVO33.2 SERVO34.2 SV33.1 SV34.1 SV35.1 U25.8
+5V9: 6=5V9.2 C55.1 C56.1 J29.2 J30.2 O10.1 R91.1 R96.1 R97.1 R98.1 R99.1 R100.1 SERVO37.2 SERVO38.2 SV37.1 SV38.1 SV39.1 U28.8
+5V10: 6=5V10.2 C61.1 C62.1 J32.2 J33.2 O11.1 R101.1 R106.1 R107.1 R108.1 R109.1 R110.1 SERVO41.2 SERVO42.2 SV41.1 SV42.1 SV43.1 U31.8
+5V11: 6=5V11.2 C67.1 C68.1 J35.2 J36.2 O12.1 R111.1 R116.1 R117.1 R118.1 R119.1 R120.1 SERVO45.2 SERVO46.2 SV45.1 SV46.1 SV47.1 U34.8
GND: C1.2 C2.2 C3.2 C4.2 C5.2 C8.2 J1.3 J2.3 J3.3 O1.3 O1.5 SV3.3 SV4.3 SV5.3 U1.4 U2.4 U3.4
GND1: C6.2 C7.2 C9.2 C10.2 C11.2 C12.2 J4.3 J5.3 J6.3 O2.3 O2.5 SV2.3 SV6.3 SV7.3 U4.4 U5.4 U6.4
GND2: C13.2 C14.2 C15.2 C16.2 C17.2 C18.2 J7.3 J8.3 J9.3 O3.3 O3.5 SV9.3 SV10.3 SV11.3 U7.4 U8.4 U9.4
GND3: C19.2 C20.2 C21.2 C22.2 C23.2 C24.2 J10.3 J11.3 J12.3 O4.3 O4.5 SV13.3 SV14.3 SV15.3 U10.4 U11.4 U12.4
GND4: C25.2 C26.2 C27.2 C28.2 C29.2 C30.2 J13.3 J14.3 J15.3 O5.3 O5.5 SV17.3 SV18.3 SV19.3 U13.4 U14.4 U15.4
GND5: C31.2 C32.2 C33.2 C34.2 C35.2 C36.2 J16.3 J17.3 J18.3 O6.3 O6.5 SV21.3 SV22.3 SV23.3 U16.4 U17.4 U18.4
GND6: C37.2 C38.2 C39.2 C40.2 C41.2 C42.2 J19.3 J20.3 J21.3 O7.3 O7.5 SV25.3 SV26.3 SV27.3 U19.4 U20.4 U21.4
GND7: C43.2 C44.2 C45.2 C46.2 C47.2 C48.2 J22.3 J23.3 J24.3 O8.3 O8.5 SV29.3 SV30.3 SV31.3 U22.4 U23.4 U24.4
GND8: C49.2 C50.2 C51.2 C52.2 C53.2 C54.2 J25.3 J26.3 J27.3 O9.3 O9.5 SV33.3 SV34.3 SV35.3 U25.4 U26.4 U27.4
GND9: C55.2 C56.2 C57.2 C58.2 C59.2 C60.2 J28.3 J29.3 J30.3 O10.3 O10.5 SV37.3 SV38.3 SV39.3 U28.4 U29.4 U30.4
GND10: C61.2 C62.2 C63.2 C64.2 C65.2 C66.2 J31.3 J32.3 J33.3 O11.3 O11.5 SV41.3 SV42.3 SV43.3 U31.4 U32.4 U33.4
GND11: C67.2 C68.2 C69.2 C70.2 C71.2 C72.2 J34.3 J35.3 J36.3 O12.3 O12.5 SV45.3 SV46.3 SV47.3 U34.4 U35.4 U36.4
N$1: O1.2 SV4.2 SV5.2 U2.6 U3.6
N$2: SV3.2 TERM.2 U2.5 U3.5
N$3: O1.4 SV3.4 SV4.4 SV5.4 TERM.1
N$4: C1.1 R1.2 U2.8 U3.8
N$5: R2.1 SV1.1
N$6: 6=5V.1 O1.6
N$7: R9.2 U1.3 U2.1 U3.1
N$8: R5.2 SERVO.2 U1.2
N$9: C4.1 J2.1 R3.2 R7.2 U1.6
N$10: R4.1 SV1.3
N$11: R3.1 SV1.2
N$12: R5.1 SERVO1.1 SV1.4
N$13: SERVO.1 U2.2 U3.2
N$14: C3.1 J3.1 R4.2 R8.2 U1.7
N$15: RESET.1 SERVO2.2 U1.1
N$16: C5.1 J1.1 R2.2 R6.2 U1.5
N$17: J1.2 RESET.2 SERVO3.1
N$18: R10.2 SERVO2.1 U2.3 U3.3
N$19: O2.2 SV6.2 SV7.2 U5.6 U6.6
N$20: SV2.2 TERM1.2 U5.5 U6.5
N$21: O2.4 SV2.4 SV6.4 SV7.4 TERM1.1
N$22: C9.1 R11.2 U5.8 U6.8
N$23: R19.2 U4.3 U5.1 U6.1
N$24: C11.1 J5.1 R13.2 R17.2 U4.6
N$25: C10.1 J6.1 R14.2 R18.2 U4.7
N$26: C12.1 J4.1 R12.2 R16.2 U4.5
N$27: RESET1.1 SERVO7.2 U4.1
N$28: R12.1 SV8.1
N$29: R14.1 SV8.3
N$30: R13.1 SV8.2
N$31: R15.1 SERVO5.1 SV8.4
N$32: R15.2 SERVO4.2 U4.2
N$33: SERVO4.1 U5.2 U6.2
N$34: 6=5V1.1 O2.6
N$35: J4.2 RESET1.2 SERVO6.1
N$36: R20.2 SERVO7.1 U5.3 U6.3
N$37: O3.2 SV10.2 SV11.2 U8.6 U9.6
N$38: SV9.2 TERM2.2 U8.5 U9.5
N$39: O3.4 SV9.4 SV10.4 SV11.4 TERM2.1
N$40: C15.1 R21.2 U8.8 U9.8
N$41: R29.2 U7.3 U8.1 U9.1
N$42: C17.1 J8.1 R23.2 R27.2 U7.6
N$43: C16.1 J9.1 R24.2 R28.2 U7.7
N$44: C18.1 J7.1 R22.2 R26.2 U7.5
N$45: RESET2.1 SERVO11.2 U7.1
N$46: R22.1 SV12.1
N$47: R24.1 SV12.3
N$48: R23.1 SV12.2
N$49: R25.1 SERVO9.1 SV12.4
N$50: R25.2 SERVO8.2 U7.2
N$51: SERVO8.1 U8.2 U9.2
N$52: 6=5V2.1 O3.6
N$53: J7.2 RESET2.2 SERVO10.1
N$54: R30.2 SERVO11.1 U8.3 U9.3
N$55: O4.2 SV14.2 SV15.2 U11.6 U12.6
N$56: SV13.2 TERM3.2 U11.5 U12.5
N$57: O4.4 SV13.4 SV14.4 SV15.4 TERM3.1
N$58: C21.1 R31.2 U11.8 U12.8
N$59: R39.2 U10.3 U11.1 U12.1
N$60: C23.1 J11.1 R33.2 R37.2 U10.6
N$61: C22.1 J12.1 R34.2 R38.2 U10.7
N$62: C24.1 J10.1 R32.2 R36.2 U10.5
N$63: RESET3.1 SERVO15.2 U10.1
N$64: R32.1 SV16.1
N$65: R34.1 SV16.3
N$66: R33.1 SV16.2
N$67: R35.1 SERVO13.1 SV16.4
N$68: R35.2 SERVO12.2 U10.2
N$69: SERVO12.1 U11.2 U12.2
N$70: 6=5V3.1 O4.6
N$71: J10.2 RESET3.2 SERVO14.1
N$72: R40.2 SERVO15.1 U11.3 U12.3
N$73: O5.2 SV18.2 SV19.2 U14.6 U15.6
N$74: SV17.2 TERM4.2 U14.5 U15.5
N$75: O5.4 SV17.4 SV18.4 SV19.4 TERM4.1
N$76: C27.1 R41.2 U14.8 U15.8
N$77: R49.2 U13.3 U14.1 U15.1
N$78: C29.1 J14.1 R43.2 R47.2 U13.6
N$79: C28.1 J15.1 R44.2 R48.2 U13.7
N$80: C30.1 J13.1 R42.2 R46.2 U13.5
N$81: RESET4.1 SERVO19.2 U13.1
N$82: R42.1 SV20.1
N$83: R44.1 SV20.3
N$84: R43.1 SV20.2
N$85: R45.1 SERVO17.1 SV20.4
N$86: R45.2 SERVO16.2 U13.2
N$87: SERVO16.1 U14.2 U15.2
N$88: 6=5V4.1 O5.6
N$89: J13.2 RESET4.2 SERVO18.1
N$90: R50.2 SERVO19.1 U14.3 U15.3
N$91: O6.2 SV22.2 SV23.2 U17.6 U18.6
N$92: SV21.2 TERM5.2 U17.5 U18.5
N$93: O6.4 SV21.4 SV22.4 SV23.4 TERM5.1
N$94: C33.1 R51.2 U17.8 U18.8
N$95: R59.2 U16.3 U17.1 U18.1
N$96: C35.1 J17.1 R53.2 R57.2 U16.6
N$97: C34.1 J18.1 R54.2 R58.2 U16.7
N$98: C36.1 J16.1 R52.2 R56.2 U16.5
N$99: RESET5.1 SERVO23.2 U16.1
N$100: R52.1 SV24.1
N$101: R54.1 SV24.3
N$102: R53.1 SV24.2
N$103: R55.1 SERVO21.1 SV24.4
N$104: R55.2 SERVO20.2 U16.2
N$105: SERVO20.1 U17.2 U18.2
N$106: 6=5V5.1 O6.6
N$107: J16.2 RESET5.2 SERVO22.1
N$108: R60.2 SERVO23.1 U17.3 U18.3
N$109: O7.2 SV26.2 SV27.2 U20.6 U21.6
N$110: SV25.2 TERM6.2 U20.5 U21.5
N$111: O7.4 SV25.4 SV26.4 SV27.4 TERM6.1
N$112: C39.1 R61.2 U20.8 U21.8
N$113: R69.2 U19.3 U20.1 U21.1
N$114: C41.1 J20.1 R63.2 R67.2 U19.6
N$115: C40.1 J21.1 R64.2 R68.2 U19.7
N$116: C42.1 J19.1 R62.2 R66.2 U19.5
N$117: RESET6.1 SERVO27.2 U19.1
N$118: R62.1 SV28.1
N$119: R64.1 SV28.3
N$120: R63.1 SV28.2
N$121: R65.1 SERVO25.1 SV28.4
N$122: R65.2 SERVO24.2 U19.2
N$123: SERVO24.1 U20.2 U21.2
N$124: 6=5V6.1 O7.6
N$125: J19.2 RESET6.2 SERVO26.1
N$126: R70.2 SERVO27.1 U20.3 U21.3
N$127: O8.2 SV30.2 SV31.2 U23.6 U24.6
N$128: SV29.2 TERM7.2 U23.5 U24.5
N$129: O8.4 SV29.4 SV30.4 SV31.4 TERM7.1
N$130: C45.1 R71.2 U23.8 U24.8
N$131: R79.2 U22.3 U23.1 U24.1
N$132: C47.1 J23.1 R73.2 R77.2 U22.6
N$133: C46.1 J24.1 R74.2 R78.2 U22.7
N$134: C48.1 J22.1 R72.2 R76.2 U22.5
N$135: RESET7.1 SERVO31.2 U22.1
N$136: R72.1 SV32.1
N$137: R74.1 SV32.3
N$138: R73.1 SV32.2
N$139: R75.1 SERVO29.1 SV32.4
N$140: R75.2 SERVO28.2 U22.2
N$141: SERVO28.1 U23.2 U24.2
N$142: 6=5V7.1 O8.6
N$143: J22.2 RESET7.2 SERVO30.1
N$144: R80.2 SERVO31.1 U23.3 U24.3
N$145: O9.2 SV34.2 SV35.2 U26.6 U27.6
N$146: SV33.2 TERM8.2 U26.5 U27.5
N$147: O9.4 SV33.4 SV34.4 SV35.4 TERM8.1
N$148: C51.1 R81.2 U26.8 U27.8
N$149: R89.2 U25.3 U26.1 U27.1
N$150: C53.1 J26.1 R83.2 R87.2 U25.6
N$151: C52.1 J27.1 R84.2 R88.2 U25.7
N$152: C54.1 J25.1 R82.2 R86.2 U25.5
N$153: RESET8.1 SERVO35.2 U25.1
N$154: R82.1 SV36.1
N$155: R84.1 SV36.3
N$156: R83.1 SV36.2
N$157: R85.1 SERVO33.1 SV36.4
N$158: R85.2 SERVO32.2 U25.2
N$159: SERVO32.1 U26.2 U27.2
N$160: 6=5V8.1 O9.6
N$161: J25.2 RESET8.2 SERVO34.1
N$162: R90.2 SERVO35.1 U26.3 U27.3
N$163: O10.2 SV38.2 SV39.2 U29.6 U30.6
N$164: SV37.2 TERM9.2 U29.5 U30.5
N$165: O10.4 SV37.4 SV38.4 SV39.4 TERM9.1
N$166: C57.1 R91.2 U29.8 U30.8
N$167: R99.2 U28.3 U29.1 U30.1
N$168: C59.1 J29.1 R93.2 R97.2 U28.6
N$169: C58.1 J30.1 R94.2 R98.2 U28.7
N$170: C60.1 J28.1 R92.2 R96.2 U28.5
N$171: RESET9.1 SERVO39.2 U28.1
N$172: R92.1 SV40.1
N$173: R94.1 SV40.3
N$174: R93.1 SV40.2
N$175: R95.1 SERVO37.1 SV40.4
N$176: R95.2 SERVO36.2 U28.2
N$177: SERVO36.1 U29.2 U30.2
N$178: 6=5V9.1 O10.6
N$179: J28.2 RESET9.2 SERVO38.1
N$180: R100.2 SERVO39.1 U29.3 U30.3
N$181: O11.2 SV42.2 SV43.2 U32.6 U33.6
N$182: SV41.2 TERM10.2 U32.5 U33.5
N$183: O11.4 SV41.4 SV42.4 SV43.4 TERM10.1
N$184: C63.1 R101.2 U32.8 U33.8
N$185: R109.2 U31.3 U32.1 U33.1
N$186: C65.1 J32.1 R103.2 R107.2 U31.6
N$187: C64.1 J33.1 R104.2 R108.2 U31.7
N$188: C66.1 J31.1 R102.2 R106.2 U31.5
N$189: RESET10.1 SERVO43.2 U31.1
N$190: R102.1 SV44.1
N$191: R104.1 SV44.3
N$192: R103.1 SV44.2
N$193: R105.1 SERVO41.1 SV44.4
N$194: R105.2 SERVO40.2 U31.2
N$195: SERVO40.1 U32.2 U33.2
N$196: 6=5V10.1 O11.6
N$197: J31.2 RESET10.2 SERVO42.1
N$198: R110.2 SERVO43.1 U32.3 U33.3
N$199: O12.2 SV46.2 SV47.2 U35.6 U36.6
N$200: SV45.2 TERM11.2 U35.5 U36.5
N$201: O12.4 SV45.4 SV46.4 SV47.4 TERM11.1
N$202: C69.1 R111.2 U35.8 U36.8
N$203: R119.2 U34.3 U35.1 U36.1
N$204: C71.1 J35.1 R113.2 R117.2 U34.6
N$205: C70.1 J36.1 R114.2 R118.2 U34.7
N$206: C72.1 J34.1 R112.2 R116.2 U34.5
N$207: RESET11.1 SERVO47.2 U34.1
N$208: R112.1 SV48.1
N$209: R114.1 SV48.3
N$210: R113.1 SV48.2
N$211: R115.1 SERVO45.1 SV48.4
N$212: R115.2 SERVO44.2 U34.2
N$213: SERVO44.1 U35.2 U36.2
N$214: 6=5V11.1 O12.6
N$215: J34.2 RESET11.2 SERVO46.1
N$216: R120.2 SERVO47.1 U35.3 U36.3

## Tracks (layer width: path | path; a pad name or v marks a point on that pad's centre or on a via)
+5V  (via drill 0.35)
  Top 0.305: R10.1 26.84,1.95 28,3.11 28,5.01 29.19,6.2 29.19,8.82
  Top 0.406: O1.1 7.44,5.01 | 29.19,8.82 v29.19,9.46 U1.8 R8.1 | C2.1 31.73,9.41 32.21,9.9 32.21,9.94 32.92,10.65 34.91,10.65 35.49,11.24 35.49,12.58 36.81,13.9 R7.1 | J3.2 J2.2 | 7.44,5.01 7.42,5.04 7.42,12.36 v8.52,13.46 9.22,14.16 SV3.1 | 7.44,5.01 10.62,1.84 SV4.1
  Bottom 0.152: C2.1 32.76,7.94 33.83,6.87 36.73,6.87 SERVO1.2
  Bottom 0.254: J3.2 43.93,13.9 42.71,12.69 41.7,12.69 40.36,14.03 R6.1 R7.1
  Bottom 0.305: J2.2 44.75,10.59 45.99,9.34 45.99,8.06 44.37,6.44 SERVO3.2
  Bottom 0.406: O1.1 4.9,3.74 3.41,3.74 | C8.1 26.4,13.9 R8.1 | C2.1 30.33,9.46 v29.19,9.46 28.94,9.21 R9.1 24.8,10.93 22.78,10.93 22.03,11.68 20.15,11.68 19,10.53 10.37,10.53 9.65,11.24 9.65,12.33 v8.52,13.46 | R1.1 26.75,1.9 R10.1 | 3.41,3.74 SV5.1 | 6=5V.2 3.41,2.47 3.41,3.74
  pour Bottom: 0.71,15.49 49.13,15.49 49.13,0.58 0.71,0.58
+5V1  (via drill 0.35)
  Top 0.305: R20.1 26.84,18.75 28,19.91 28,21.82 29.19,23 29.19,25.63
  Top 0.406: O2.1 7.44,21.82 | 29.19,25.63 v29.19,26.26 U4.8 R18.1 | C7.1 31.73,26.21 32.21,26.7 32.21,26.74 32.92,27.45 34.91,27.45 35.49,28.04 35.49,29.38 36.81,30.71 R17.1 | J6.2 J5.2 | 7.44,21.82 7.42,21.84 7.42,29.16 v8.52,30.26 9.22,30.96 SV2.1 | 7.44,21.82 10.62,18.64 SV6.1
  Bottom 0.152: C7.1 32.76,24.74 33.83,23.67 36.73,23.67 SERVO5.2
  Bottom 0.254: J6.2 43.93,30.71 42.71,29.49 41.7,29.49 40.36,30.83 R16.1 R17.1
  Bottom 0.305: J5.2 44.75,27.39 45.99,26.14 45.99,24.86 44.37,23.24 SERVO6.2
  Bottom 0.406: O2.1 4.9,20.55 3.41,20.55 | C6.1 26.4,30.71 R18.1 | C7.1 30.33,26.26 v29.19,26.26 28.94,26.01 R19.1 24.8,27.73 22.78,27.73 22.03,28.48 20.15,28.48 19,27.33 10.37,27.33 9.65,28.04 9.65,29.13 v8.52,30.26 | R11.1 26.75,18.7 R20.1 | 3.41,20.55 SV7.1 | 6=5V1.2 3.41,19.28 3.41,20.55
  pour Bottom: 0.71,32.29 49.13,32.29 49.13,17.38 0.71,17.38
+5V2  (via drill 0.35)
  Top 0.305: R30.1 26.84,35.55 28,36.71 28,38.62 29.19,39.8 29.19,42.43
  Top 0.406: O3.1 7.44,38.62 | 29.19,42.43 v29.19,43.06 U7.8 R28.1 | C14.1 31.73,43.01 32.21,43.5 32.21,43.54 32.92,44.25 34.91,44.25 35.49,44.84 35.49,46.18 36.81,47.51 R27.1 | J9.2 J8.2 | 7.44,38.62 7.42,38.64 7.42,45.96 v8.52,47.06 9.22,47.76 SV9.1 | 7.44,38.62 10.62,35.44 SV10.1
  Bottom 0.152: C14.1 32.76,41.54 33.83,40.47 36.73,40.47 SERVO9.2
  Bottom 0.254: J9.2 43.93,47.51 42.71,46.29 41.7,46.29 40.36,47.63 R26.1 R27.1
  Bottom 0.305: J8.2 44.75,44.19 45.99,42.94 45.99,41.66 44.37,40.04 SERVO10.2
  Bottom 0.406: O3.1 4.9,37.35 3.41,37.35 | C13.1 26.4,47.51 R28.1 | C14.1 30.33,43.06 v29.19,43.06 28.94,42.81 R29.1 24.8,44.53 22.78,44.53 22.03,45.28 20.15,45.28 19,44.13 10.37,44.13 9.65,44.84 9.65,45.93 v8.52,47.06 | R21.1 26.75,35.5 R30.1 | 3.41,37.35 SV11.1 | 6=5V2.2 3.41,36.08 3.41,37.35
  pour Bottom: 0.71,49.09 49.13,49.09 49.13,34.18 0.71,34.18
+5V3  (via drill 0.35)
  Top 0.305: R40.1 26.84,52.35 28,53.51 28,55.42 29.19,56.6 29.19,59.23
  Top 0.406: O4.1 7.44,55.42 | 29.19,59.23 v29.19,59.86 U10.8 R38.1 | C20.1 31.73,59.81 32.21,60.3 32.21,60.34 32.92,61.05 34.91,61.05 35.49,61.64 35.49,62.98 36.81,64.31 R37.1 | J12.2 J11.2 | 7.44,55.42 7.42,55.44 7.42,62.76 v8.52,63.86 9.22,64.56 SV13.1 | 7.44,55.42 10.62,52.24 SV14.1
  Bottom 0.152: C20.1 32.76,58.34 33.83,57.27 36.73,57.27 SERVO13.2
  Bottom 0.254: J12.2 43.93,64.31 42.71,63.09 41.7,63.09 40.36,64.43 R36.1 R37.1
  Bottom 0.305: J11.2 44.75,60.99 45.99,59.74 45.99,58.46 44.37,56.84 SERVO14.2
  Bottom 0.406: O4.1 4.9,54.15 3.41,54.15 | C19.1 26.4,64.31 R38.1 | C20.1 30.33,59.86 v29.19,59.86 28.94,59.61 R39.1 24.8,61.33 22.78,61.33 22.03,62.08 20.15,62.08 19,60.93 10.37,60.93 9.65,61.64 9.65,62.73 v8.52,63.86 | R31.1 26.75,52.3 R40.1 | 3.41,54.15 SV15.1 | 6=5V3.2 3.41,52.88 3.41,54.15
  pour Bottom: 0.71,65.89 49.13,65.89 49.13,50.98 0.71,50.98
+5V4  (via drill 0.35)
  Top 0.305: R50.1 26.84,69.15 28,70.31 28,72.22 29.19,73.4 29.19,76.03
  Top 0.406: O5.1 7.44,72.22 | 29.19,76.03 v29.19,76.66 U13.8 R48.1 | C26.1 31.73,76.61 32.21,77.1 32.21,77.14 32.92,77.85 34.91,77.85 35.49,78.44 35.49,79.79 36.81,81.11 R47.1 | J15.2 J14.2 | 7.44,72.22 7.42,72.24 7.42,79.56 v8.52,80.66 9.22,81.36 SV17.1 | 7.44,72.22 10.62,69.04 SV18.1
  Bottom 0.152: C26.1 32.76,75.14 33.83,74.07 36.73,74.07 SERVO17.2
  Bottom 0.254: J15.2 43.93,81.11 42.71,79.89 41.7,79.89 40.36,81.23 R46.1 R47.1
  Bottom 0.305: J14.2 44.75,77.79 45.99,76.54 45.99,75.26 44.37,73.64 SERVO18.2
  Bottom 0.406: O5.1 4.9,70.95 3.41,70.95 | C25.1 26.4,81.11 R48.1 | C26.1 30.33,76.66 v29.19,76.66 28.94,76.41 R49.1 24.8,78.13 22.78,78.13 22.03,78.88 20.15,78.88 19,77.73 10.37,77.73 9.65,78.44 9.65,79.53 v8.52,80.66 | R41.1 26.75,69.1 R50.1 | 3.41,70.95 SV19.1 | 6=5V4.2 3.41,69.68 3.41,70.95
  pour Bottom: 0.71,82.69 49.13,82.69 49.13,67.78 0.71,67.78
+5V5  (via drill 0.35)
  Top 0.305: R60.1 26.84,85.95 28,87.11 28,89.02 29.19,90.2 29.19,92.83
  Top 0.406: O6.1 7.44,89.02 | 29.19,92.83 v29.19,93.46 U16.8 R58.1 | C32.1 31.73,93.41 32.21,93.9 32.21,93.94 32.92,94.65 34.91,94.65 35.49,95.24 35.49,96.59 36.81,97.91 R57.1 | J18.2 J17.2 | 7.44,89.02 7.42,89.04 7.42,96.36 v8.52,97.46 9.22,98.16 SV21.1 | 7.44,89.02 10.62,85.84 SV22.1
  Bottom 0.152: C32.1 32.76,91.94 33.83,90.87 36.73,90.87 SERVO21.2
  Bottom 0.254: J18.2 43.93,97.91 42.71,96.69 41.7,96.69 40.36,98.03 R56.1 R57.1
  Bottom 0.305: J17.2 44.75,94.59 45.99,93.34 45.99,92.06 44.37,90.44 SERVO22.2
  Bottom 0.406: O6.1 4.9,87.75 3.41,87.75 | C31.1 26.4,97.91 R58.1 | C32.1 30.33,93.46 v29.19,93.46 28.94,93.21 R59.1 24.8,94.93 22.78,94.93 22.03,95.68 20.15,95.68 19,94.53 10.37,94.53 9.65,95.24 9.65,96.33 v8.52,97.46 | R51.1 26.75,85.9 R60.1 | 3.41,87.75 SV23.1 | 6=5V5.2 3.41,86.48 3.41,87.75
  pour Bottom: 0.71,99.49 49.13,99.49 49.13,84.58 0.71,84.58
+5V6  (via drill 0.35)
  Top 0.305: R70.1 77.24,1.95 78.4,3.11 78.4,5.01 79.59,6.2 79.59,8.82
  Top 0.406: O7.1 57.84,5.01 | 79.59,8.82 v79.59,9.46 U19.8 R68.1 | C38.1 82.13,9.41 82.61,9.9 82.61,9.94 83.32,10.65 85.31,10.65 85.89,11.24 85.89,12.58 87.21,13.9 R67.1 | J21.2 J20.2 | 57.84,5.01 57.82,5.04 57.82,12.36 v58.92,13.46 59.62,14.16 SV25.1 | 57.84,5.01 61.02,1.84 SV26.1
  Bottom 0.152: C38.1 83.16,7.94 84.23,6.87 87.13,6.87 SERVO25.2
  Bottom 0.254: J21.2 94.33,13.9 93.11,12.69 92.1,12.69 90.76,14.03 R66.1 R67.1
  Bottom 0.305: J20.2 95.15,10.59 96.39,9.34 96.39,8.06 94.77,6.44 SERVO26.2
  Bottom 0.406: O7.1 55.3,3.74 53.81,3.74 | C37.1 76.8,13.9 R68.1 | C38.1 80.73,9.46 v79.59,9.46 79.34,9.21 R69.1 75.2,10.93 73.18,10.93 72.43,11.68 70.55,11.68 69.4,10.53 60.77,10.53 60.05,11.24 60.05,12.33 v58.92,13.46 | R61.1 77.15,1.9 R70.1 | 53.81,3.74 SV27.1 | 6=5V6.2 53.81,2.47 53.81,3.74
  pour Bottom: 51.11,15.49 99.53,15.49 99.53,0.58 51.11,0.58
+5V7  (via drill 0.35)
  Top 0.305: R80.1 77.24,18.75 78.4,19.91 78.4,21.82 79.59,23 79.59,25.63
  Top 0.406: O8.1 57.84,21.82 | 79.59,25.63 v79.59,26.26 U22.8 R78.1 | C44.1 82.13,26.21 82.61,26.7 82.61,26.74 83.32,27.45 85.31,27.45 85.89,28.04 85.89,29.38 87.21,30.71 R77.1 | J24.2 J23.2 | 57.84,21.82 57.82,21.84 57.82,29.16 v58.92,30.26 59.62,30.96 SV29.1 | 57.84,21.82 61.02,18.64 SV30.1
  Bottom 0.152: C44.1 83.16,24.74 84.23,23.67 87.13,23.67 SERVO29.2
  Bottom 0.254: J24.2 94.33,30.71 93.11,29.49 92.1,29.49 90.76,30.83 R76.1 R77.1
  Bottom 0.305: J23.2 95.15,27.39 96.39,26.14 96.39,24.86 94.77,23.24 SERVO30.2
  Bottom 0.406: O8.1 55.3,20.55 53.81,20.55 | C43.1 76.8,30.71 R78.1 | C44.1 80.73,26.26 v79.59,26.26 79.34,26.01 R79.1 75.2,27.73 73.18,27.73 72.43,28.48 70.55,28.48 69.4,27.33 60.77,27.33 60.05,28.04 60.05,29.13 v58.92,30.26 | R71.1 77.15,18.7 R80.1 | 53.81,20.55 SV31.1 | 6=5V7.2 53.81,19.28 53.81,20.55
  pour Bottom: 51.11,32.29 99.53,32.29 99.53,17.38 51.11,17.38
+5V8  (via drill 0.35)
  Top 0.305: R90.1 77.24,35.55 78.4,36.71 78.4,38.62 79.59,39.8 79.59,42.43
  Top 0.406: O9.1 57.84,38.62 | 79.59,42.43 v79.59,43.06 U25.8 R88.1 | C50.1 82.13,43.01 82.61,43.5 82.61,43.54 83.32,44.25 85.31,44.25 85.89,44.84 85.89,46.18 87.21,47.51 R87.1 | J27.2 J26.2 | 57.84,38.62 57.82,38.64 57.82,45.96 v58.92,47.06 59.62,47.76 SV33.1 | 57.84,38.62 61.02,35.44 SV34.1
  Bottom 0.152: C50.1 83.16,41.54 84.23,40.47 87.13,40.47 SERVO33.2
  Bottom 0.254: J27.2 94.33,47.51 93.11,46.29 92.1,46.29 90.76,47.63 R86.1 R87.1
  Bottom 0.305: J26.2 95.15,44.19 96.39,42.94 96.39,41.66 94.77,40.04 SERVO34.2
  Bottom 0.406: O9.1 55.3,37.35 53.81,37.35 | C49.1 76.8,47.51 R88.1 | C50.1 80.73,43.06 v79.59,43.06 79.34,42.81 R89.1 75.2,44.53 73.18,44.53 72.43,45.28 70.55,45.28 69.4,44.13 60.77,44.13 60.05,44.84 60.05,45.93 v58.92,47.06 | R81.1 77.15,35.5 R90.1 | 53.81,37.35 SV35.1 | 6=5V8.2 53.81,36.08 53.81,37.35
  pour Bottom: 51.11,49.09 99.53,49.09 99.53,34.18 51.11,34.18
+5V9  (via drill 0.35)
  Top 0.305: R100.1 77.24,52.35 78.4,53.51 78.4,55.42 79.59,56.6 79.59,59.23
  Top 0.406: O10.1 57.84,55.42 | 79.59,59.23 v79.59,59.86 U28.8 R98.1 | C56.1 82.13,59.81 82.61,60.3 82.61,60.34 83.32,61.05 85.31,61.05 85.89,61.64 85.89,62.98 87.21,64.31 R97.1 | J30.2 J29.2 | 57.84,55.42 57.82,55.44 57.82,62.76 v58.92,63.86 59.62,64.56 SV37.1 | 57.84,55.42 61.02,52.24 SV38.1
  Bottom 0.152: C56.1 83.16,58.34 84.23,57.27 87.13,57.27 SERVO37.2
  Bottom 0.254: J30.2 94.33,64.31 93.11,63.09 92.1,63.09 90.76,64.43 R96.1 R97.1
  Bottom 0.305: J29.2 95.15,60.99 96.39,59.74 96.39,58.46 94.77,56.84 SERVO38.2
  Bottom 0.406: O10.1 55.3,54.15 53.81,54.15 | C55.1 76.8,64.31 R98.1 | C56.1 80.73,59.86 v79.59,59.86 79.34,59.61 R99.1 75.2,61.33 73.18,61.33 72.43,62.08 70.55,62.08 69.4,60.93 60.77,60.93 60.05,61.64 60.05,62.73 v58.92,63.86 | R91.1 77.15,52.3 R100.1 | 53.81,54.15 SV39.1 | 6=5V9.2 53.81,52.88 53.81,54.15
  pour Bottom: 51.11,65.89 99.53,65.89 99.53,50.98 51.11,50.98
+5V10  (via drill 0.35)
  Top 0.305: R110.1 77.24,69.15 78.4,70.31 78.4,72.22 79.59,73.4 79.59,76.03
  Top 0.406: O11.1 57.84,72.22 | 79.59,76.03 v79.59,76.66 U31.8 R108.1 | C62.1 82.13,76.61 82.61,77.1 82.61,77.14 83.32,77.85 85.31,77.85 85.89,78.44 85.89,79.79 87.21,81.11 R107.1 | J33.2 J32.2 | 57.84,72.22 57.82,72.24 57.82,79.56 v58.92,80.66 59.62,81.36 SV41.1 | 57.84,72.22 61.02,69.04 SV42.1
  Bottom 0.152: C62.1 83.16,75.14 84.23,74.07 87.13,74.07 SERVO41.2
  Bottom 0.254: J33.2 94.33,81.11 93.11,79.89 92.1,79.89 90.76,81.23 R106.1 R107.1
  Bottom 0.305: J32.2 95.15,77.79 96.39,76.54 96.39,75.26 94.77,73.64 SERVO42.2
  Bottom 0.406: O11.1 55.3,70.95 53.81,70.95 | C61.1 76.8,81.11 R108.1 | C62.1 80.73,76.66 v79.59,76.66 79.34,76.41 R109.1 75.2,78.13 73.18,78.13 72.43,78.88 70.55,78.88 69.4,77.73 60.77,77.73 60.05,78.44 60.05,79.53 v58.92,80.66 | R101.1 77.15,69.1 R110.1 | 53.81,70.95 SV43.1 | 6=5V10.2 53.81,69.68 53.81,70.95
  pour Bottom: 51.11,82.69 99.53,82.69 99.53,67.78 51.11,67.78
+5V11  (via drill 0.35)
  Top 0.305: R120.1 77.24,85.95 78.4,87.11 78.4,89.02 79.59,90.2 79.59,92.83
  Top 0.406: O12.1 57.84,89.02 | 79.59,92.83 v79.59,93.46 U34.8 R118.1 | C68.1 82.13,93.41 82.61,93.9 82.61,93.94 83.32,94.65 85.31,94.65 85.89,95.24 85.89,96.59 87.21,97.91 R117.1 | J36.2 J35.2 | 57.84,89.02 57.82,89.04 57.82,96.36 v58.92,97.46 59.62,98.16 SV45.1 | 57.84,89.02 61.02,85.84 SV46.1
  Bottom 0.152: C68.1 83.16,91.94 84.23,90.87 87.13,90.87 SERVO45.2
  Bottom 0.254: J36.2 94.33,97.91 93.11,96.69 92.1,96.69 90.76,98.03 R116.1 R117.1
  Bottom 0.305: J35.2 95.15,94.59 96.39,93.34 96.39,92.06 94.77,90.44 SERVO46.2
  Bottom 0.406: O12.1 55.3,87.75 53.81,87.75 | C67.1 76.8,97.91 R118.1 | C68.1 80.73,93.46 v79.59,93.46 79.34,93.21 R119.1 75.2,94.93 73.18,94.93 72.43,95.68 70.55,95.68 69.4,94.53 60.77,94.53 60.05,95.24 60.05,96.33 v58.92,97.46 | R111.1 77.15,85.9 R120.1 | 53.81,87.75 SV47.1 | 6=5V11.2 53.81,86.48 53.81,87.75
  pour Bottom: 51.11,99.49 99.53,99.49 99.53,84.58 51.11,84.58
GND  (via drill 0.35)
  Top 0.406: O1.3 O1.5 | U1.4 36.68,4.25 34.27,6.67 C2.2 | J1.3 J2.3 J3.3 | SV4.3 16.21,1.84 U2.4 18.49,5.06 18.52,5.09 18.52,8.65 17.27,9.9 17.27,12.71 15.95,14.03 SV3.3 14.76,12.97 10.37,12.97 9.65,12.25 9.65,12.18 9.38,11.9 v8.4,11.9
  Bottom 0.152: SV4.3 16.98,1.84 18.05,2.91 18.93,2.91 20,1.84 C1.2
  Bottom 0.406: 6.19,10.07 O1.5 | O1.3 4.9,8.82 SV5.3 | SV3.3 17.15,12.97 22.51,12.97 C8.2 22.71,12.64 23.86,11.49 27.85,11.49 28.69,10.65 31.81,10.65 34.27,8.19 C2.2 34.33,7.87 C3.2 C4.2 C5.2 40.26,7.73 41.11,7.73 J1.3 | v8.4,11.9 8.02,11.9 6.19,10.07 | U3.4 6.68,9.59 6.19,10.07
  pour Top: 0.71,15.49 49.13,15.49 49.13,0.58 0.71,0.58
GND1  (via drill 0.35)
  Top 0.406: O2.3 O2.5 | U4.4 36.68,21.05 34.27,23.47 C7.2 | J4.3 J5.3 J6.3 | SV6.3 16.21,18.64 U5.4 18.49,21.86 18.52,21.89 18.52,25.45 17.27,26.7 17.27,29.51 15.95,30.83 SV2.3 14.76,29.77 10.37,29.77 9.65,29.05 9.65,28.98 9.38,28.7 v8.4,28.7
  Bottom 0.152: SV6.3 16.98,18.64 18.05,19.71 18.93,19.71 20,18.64 C9.2
  Bottom 0.406: 6.19,26.87 O2.5 | O2.3 4.9,25.63 SV7.3 | SV2.3 17.15,29.77 22.51,29.77 C6.2 22.71,29.44 23.86,28.29 27.85,28.29 28.69,27.45 31.81,27.45 34.27,24.99 C7.2 34.33,24.68 C10.2 C11.2 C12.2 40.26,24.53 41.11,24.53 J4.3 | v8.4,28.7 8.02,28.7 6.19,26.87 | U6.4 6.68,26.39 6.19,26.87
  pour Top: 0.71,32.29 49.13,32.29 49.13,17.38 0.71,17.38
GND2  (via drill 0.35)
  Top 0.406: O3.3 O3.5 | U7.4 36.68,37.85 34.27,40.27 C14.2 | J7.3 J8.3 J9.3 | SV10.3 16.21,35.44 U8.4 18.49,38.66 18.52,38.69 18.52,42.25 17.27,43.5 17.27,46.31 15.95,47.63 SV9.3 14.76,46.57 10.37,46.57 9.65,45.85 9.65,45.78 9.38,45.5 v8.4,45.5
  Bottom 0.152: SV10.3 16.98,35.44 18.05,36.51 18.93,36.51 20,35.44 C15.2
  Bottom 0.406: 6.19,43.67 O3.5 | O3.3 4.9,42.43 SV11.3 | SV9.3 17.15,46.57 22.51,46.57 C13.2 22.71,46.24 23.86,45.09 27.85,45.09 28.69,44.25 31.81,44.25 34.27,41.79 C14.2 34.33,41.48 C16.2 C17.2 C18.2 40.26,41.33 41.11,41.33 J7.3 | v8.4,45.5 8.02,45.5 6.19,43.67 | U9.4 6.68,43.19 6.19,43.67
  pour Top: 0.71,49.09 49.13,49.09 49.13,34.18 0.71,34.18
GND3  (via drill 0.35)
  Top 0.406: O4.3 O4.5 | U10.4 36.68,54.65 34.27,57.07 C20.2 | J10.3 J11.3 J12.3 | SV14.3 16.21,52.24 U11.4 18.49,55.46 18.52,55.49 18.52,59.05 17.27,60.3 17.27,63.11 15.95,64.43 SV13.3 14.76,63.37 10.37,63.37 9.65,62.65 9.65,62.58 9.38,62.3 v8.4,62.3
  Bottom 0.152: SV14.3 16.98,52.24 18.05,53.31 18.93,53.31 20,52.24 C21.2
  Bottom 0.406: 6.19,60.47 O4.5 | O4.3 4.9,59.23 SV15.3 | SV13.3 17.15,63.37 22.51,63.37 C19.2 22.71,63.04 23.86,61.89 27.85,61.89 28.69,61.05 31.81,61.05 34.27,58.59 C20.2 34.33,58.28 C22.2 C23.2 C24.2 40.26,58.13 41.11,58.13 J10.3 | v8.4,62.3 8.02,62.3 6.19,60.47 | U12.4 6.68,59.99 6.19,60.47
  pour Top: 0.71,65.89 49.13,65.89 49.13,50.98 0.71,50.98
GND4  (via drill 0.35)
  Top 0.406: O5.3 O5.5 | U13.4 36.68,71.45 34.27,73.87 C26.2 | J13.3 J14.3 J15.3 | SV18.3 16.21,69.04 U14.4 18.49,72.26 18.52,72.29 18.52,75.85 17.27,77.1 17.27,79.91 15.95,81.23 SV17.3 14.76,80.17 10.37,80.17 9.65,79.45 9.65,79.38 9.38,79.1 v8.4,79.1
  Bottom 0.152: SV18.3 16.98,69.04 18.05,70.11 18.93,70.11 20,69.04 C27.2
  Bottom 0.406: 6.19,77.27 O5.5 | O5.3 4.9,76.03 SV19.3 | SV17.3 17.15,80.17 22.51,80.17 C25.2 22.71,79.84 23.86,78.69 27.85,78.69 28.69,77.85 31.81,77.85 34.27,75.39 C26.2 34.33,75.08 C28.2 C29.2 C30.2 40.26,74.93 41.11,74.93 J13.3 | v8.4,79.1 8.02,79.1 6.19,77.27 | U15.4 6.68,76.79 6.19,77.27
  pour Top: 0.71,82.69 49.13,82.69 49.13,67.78 0.71,67.78
GND5  (via drill 0.35)
  Top 0.406: O6.3 O6.5 | U16.4 36.68,88.25 34.27,90.67 C32.2 | J16.3 J17.3 J18.3 | SV22.3 16.21,85.84 U17.4 18.49,89.06 18.52,89.09 18.52,92.65 17.27,93.9 17.27,96.71 15.95,98.03 SV21.3 14.76,96.97 10.37,96.97 9.65,96.25 9.65,96.18 9.38,95.9 v8.4,95.9
  Bottom 0.152: SV22.3 16.98,85.84 18.05,86.91 18.93,86.91 20,85.84 C33.2
  Bottom 0.406: 6.19,94.07 O6.5 | O6.3 4.9,92.83 SV23.3 | SV21.3 17.15,96.97 22.51,96.97 C31.2 22.71,96.64 23.86,95.49 27.85,95.49 28.69,94.65 31.81,94.65 34.27,92.19 C32.2 34.33,91.88 C34.2 C35.2 C36.2 40.26,91.73 41.11,91.73 J16.3 | v8.4,95.9 8.02,95.9 6.19,94.07 | U18.4 6.68,93.59 6.19,94.07
  pour Top: 0.71,99.49 49.13,99.49 49.13,84.58 0.71,84.58
GND6  (via drill 0.35)
  Top 0.406: O7.3 O7.5 | U19.4 87.08,4.25 84.67,6.67 C38.2 | J19.3 J20.3 J21.3 | SV26.3 66.61,1.84 U20.4 68.89,5.06 68.92,5.09 68.92,8.65 67.67,9.9 67.67,12.71 66.35,14.03 SV25.3 65.16,12.97 60.77,12.97 60.05,12.25 60.05,12.18 59.78,11.9 v58.8,11.9
  Bottom 0.152: SV26.3 67.38,1.84 68.45,2.91 69.33,2.91 70.4,1.84 C39.2
  Bottom 0.406: 56.59,10.07 O7.5 | O7.3 55.3,8.82 SV27.3 | SV25.3 67.55,12.97 72.91,12.97 C37.2 73.11,12.64 74.26,11.49 78.25,11.49 79.09,10.65 82.21,10.65 84.67,8.19 C38.2 84.73,7.87 C40.2 C41.2 C42.2 90.66,7.73 91.51,7.73 J19.3 | v58.8,11.9 58.42,11.9 56.59,10.07 | U21.4 57.08,9.59 56.59,10.07
  pour Top: 51.11,15.49 99.53,15.49 99.53,0.58 51.11,0.58
GND7  (via drill 0.35)
  Top 0.406: O8.3 O8.5 | U22.4 87.08,21.05 84.67,23.47 C44.2 | J22.3 J23.3 J24.3 | SV30.3 66.61,18.64 U23.4 68.89,21.86 68.92,21.89 68.92,25.45 67.67,26.7 67.67,29.51 66.35,30.83 SV29.3 65.16,29.77 60.77,29.77 60.05,29.05 60.05,28.98 59.78,28.7 v58.8,28.7
  Bottom 0.152: SV30.3 67.38,18.64 68.45,19.71 69.33,19.71 70.4,18.64 C45.2
  Bottom 0.406: 56.59,26.87 O8.5 | O8.3 55.3,25.63 SV31.3 | SV29.3 67.55,29.77 72.91,29.77 C43.2 73.11,29.44 74.26,28.29 78.25,28.29 79.09,27.45 82.21,27.45 84.67,24.99 C44.2 84.73,24.68 C46.2 C47.2 C48.2 90.66,24.53 91.51,24.53 J22.3 | v58.8,28.7 58.42,28.7 56.59,26.87 | U24.4 57.08,26.39 56.59,26.87
  pour Top: 51.11,32.29 99.53,32.29 99.53,17.38 51.11,17.38